# Altium PCB CSI2-IXORA_Rev01.PcbDoc
Units mm, origin at the board's own origin, x right, y up, seen from the top; angles counter-clockwise.
Board outline 24 x 36 mm, 4 copper layers (Layer1 Top, Layer2, Layer3, Layer4 Bottom), stack 1.62 mm thick; 34 components, 30 nets, 118 pads, 71 vias.
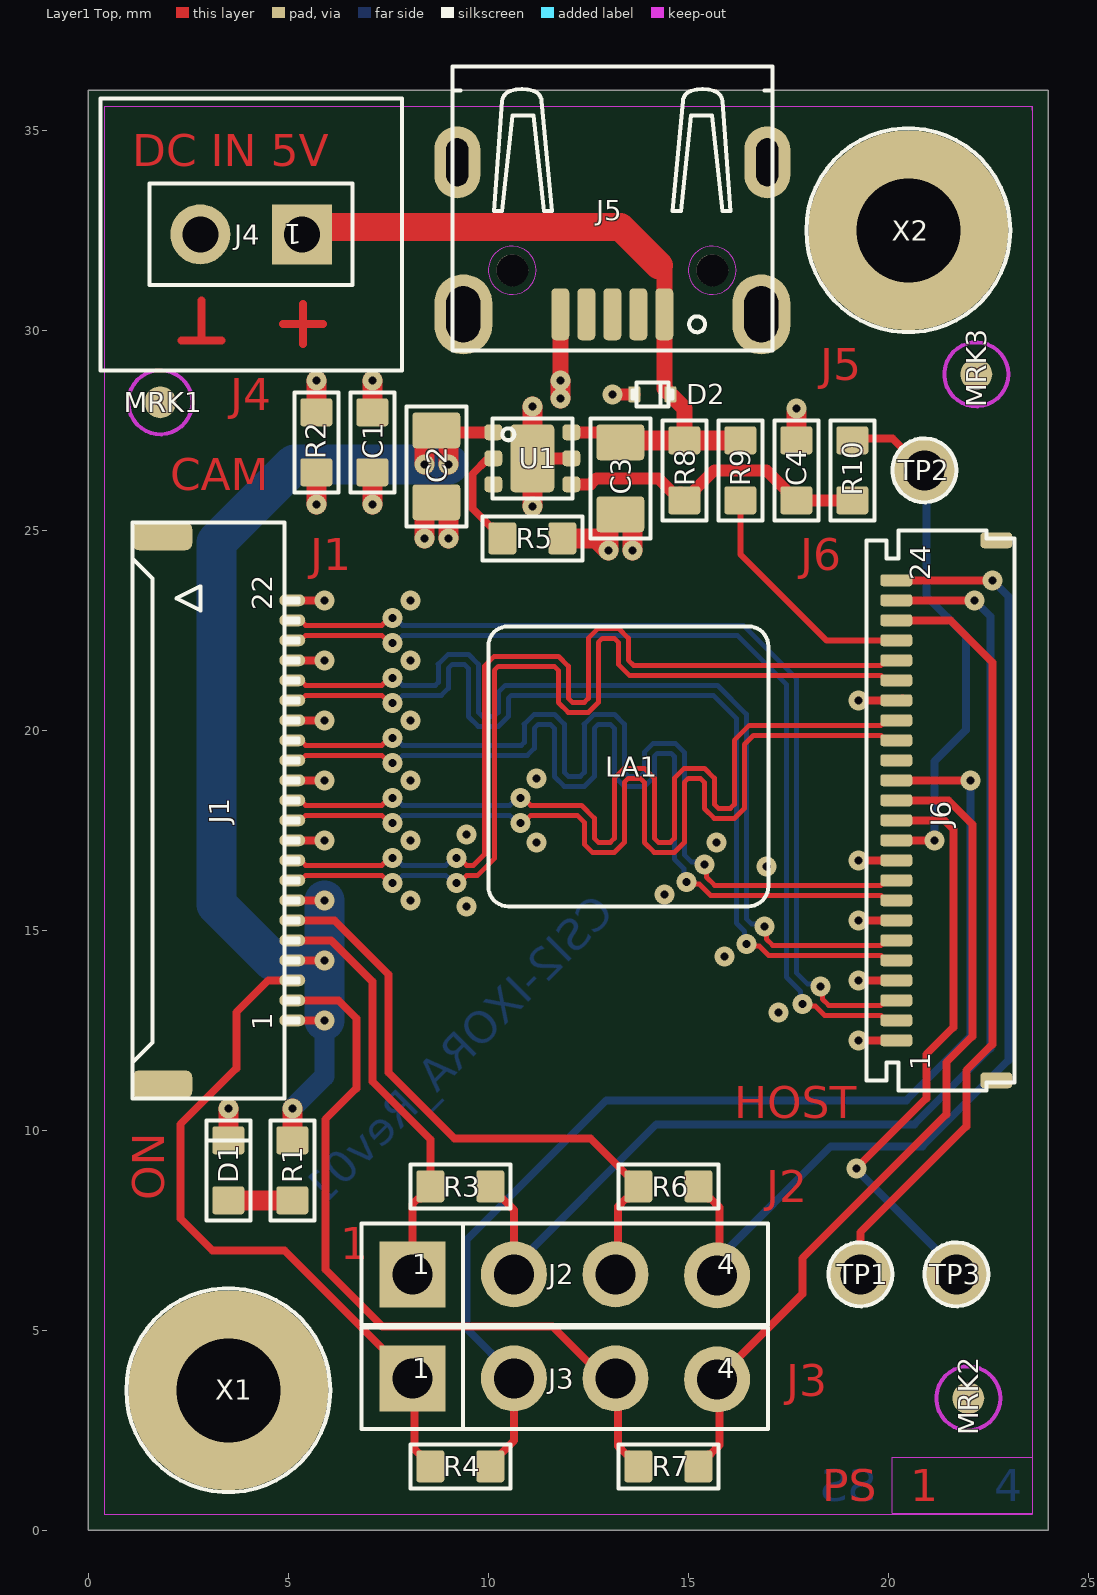
[diagram p0: Layer1 Top view]
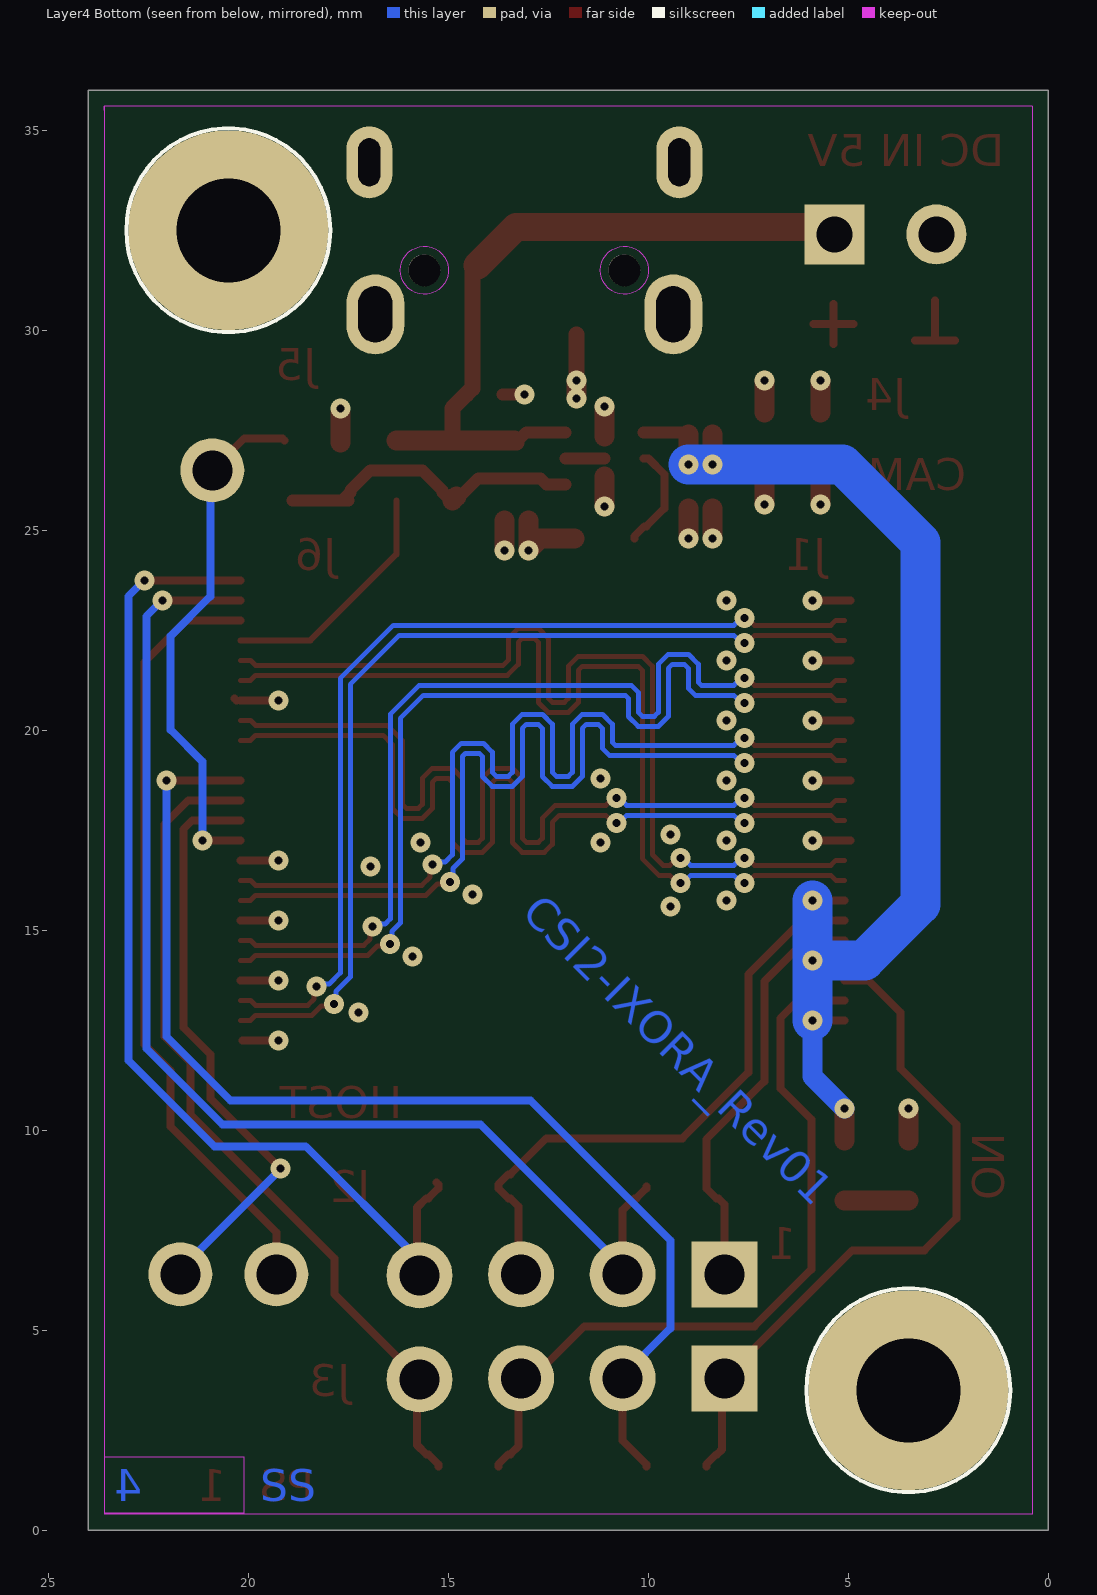
[diagram p1: Layer4 Bottom view, seen from below]
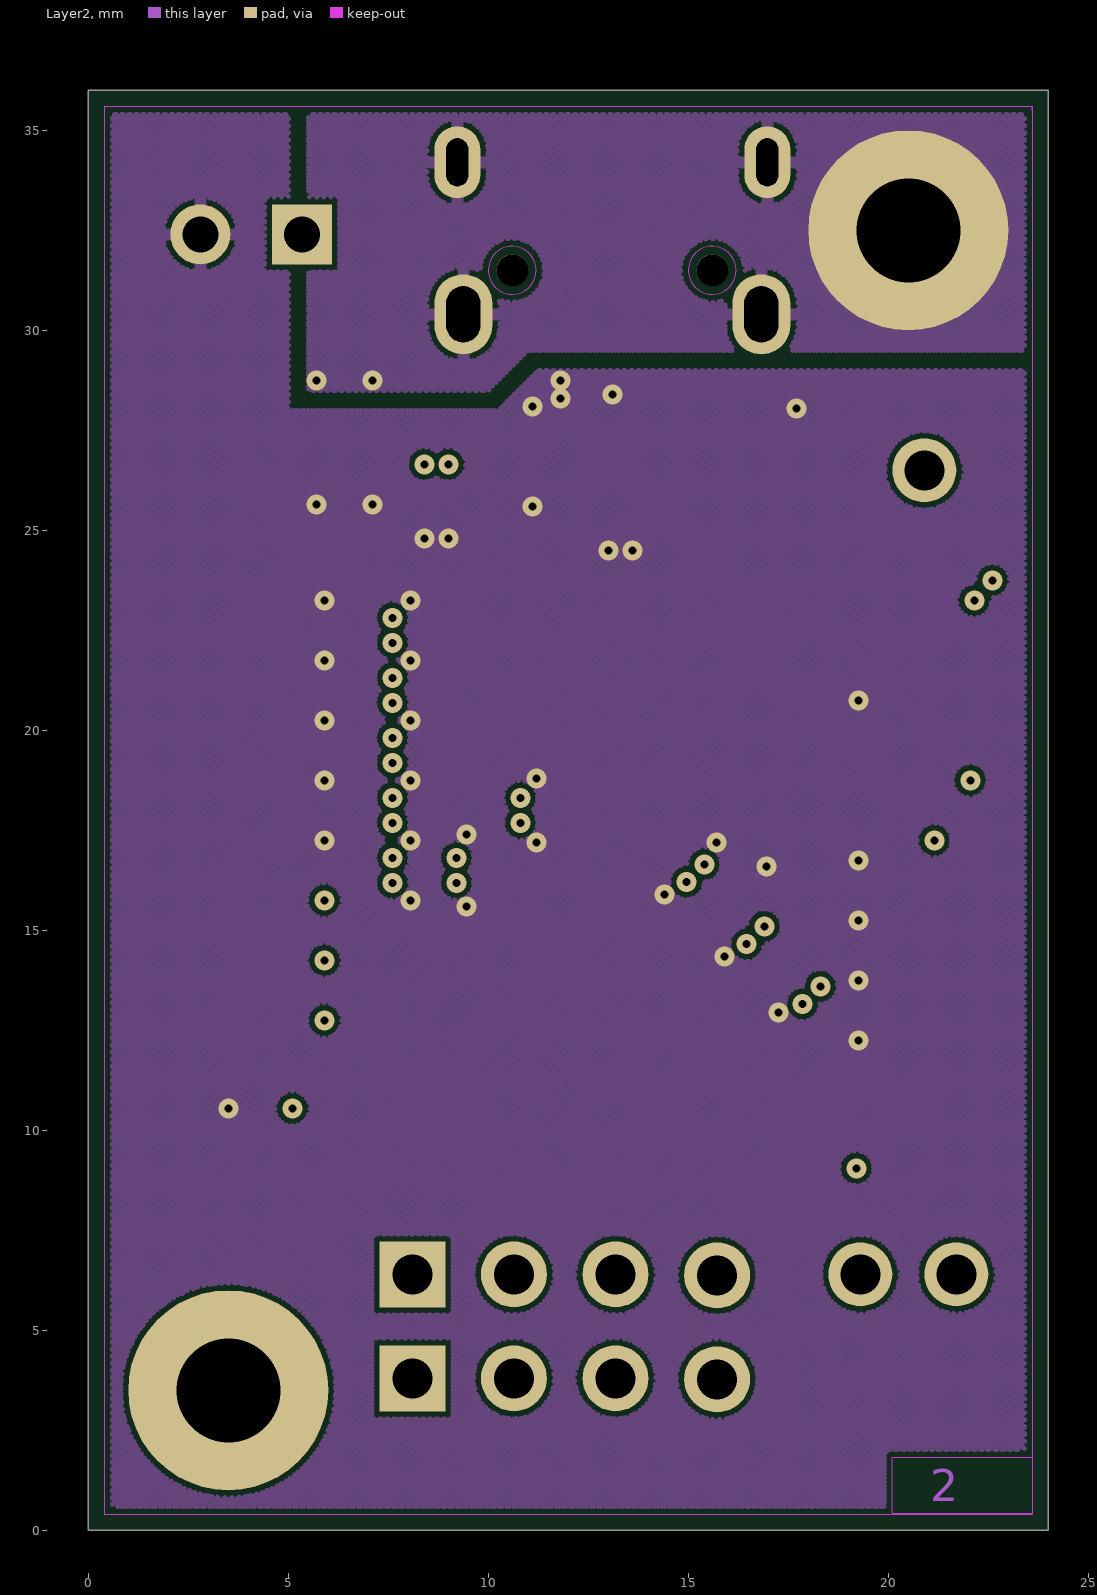
[diagram p2: Layer2]
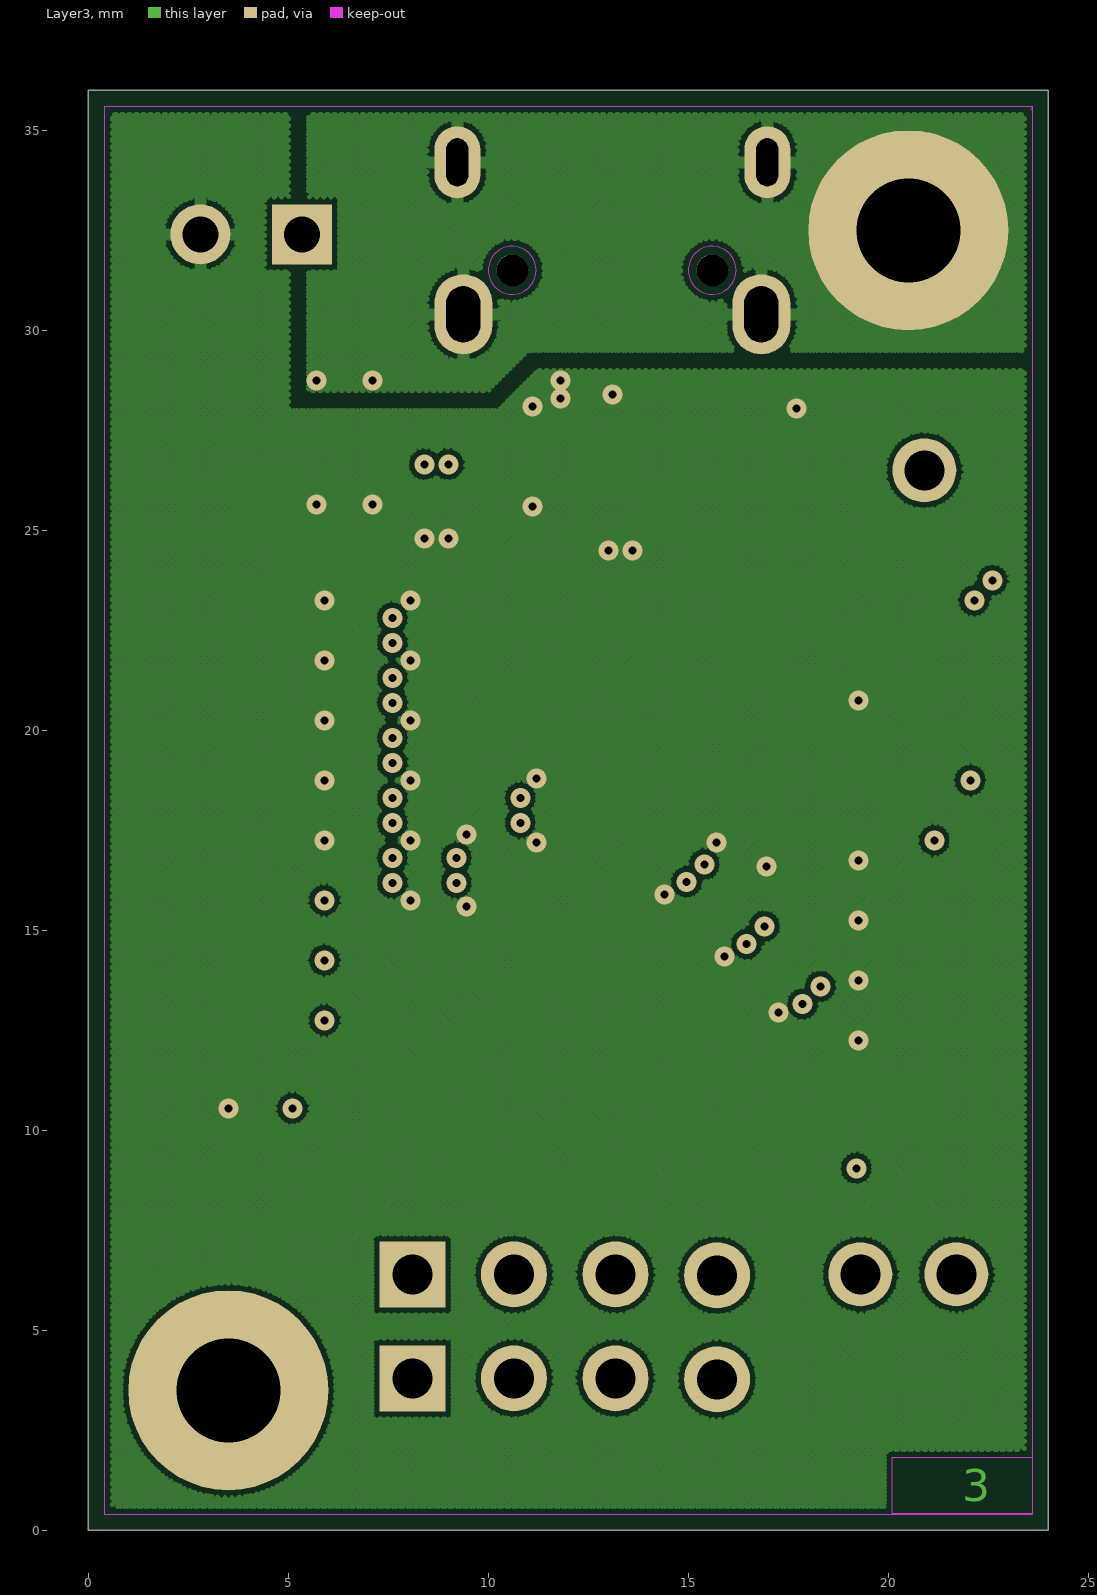
[diagram p3: Layer3]
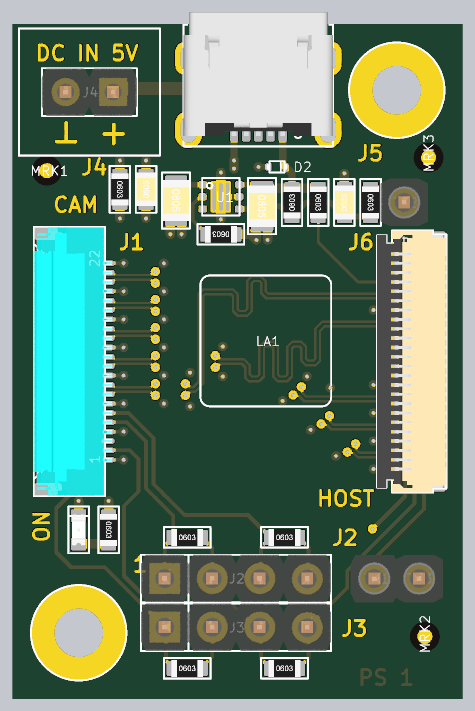
[diagram p4: 3D render of the assembled board from above, using the file's embedded part models]

## Layer stack, top to bottom
Top Solder: solder mask 0.025, Solder Resist, Dk 3.5
Layer1 Top: signal copper 0.035
Dielectric1: prepreg 0.14, PP-006, Dk 4.1
Layer2: signal copper 0.035
Dielectric2: core 1.2, Core-039, Dk 4.8
Layer3: signal copper 0.035
Dielectric3: prepreg 0.14, PP-006, Dk 4.1
Layer4 Bottom: signal copper 0.035
Bottom Solder: solder mask 0.025, Solder Resist, Dk 3.5

## Board outline
0,0 24,0 24,36 0,36

## Design rules (kind name [scope] priority, off if disabled: settings)
Clearance [All] p1: gap=0.125 ignorepadtopadclearanceinfootprint=FALSE except(0: Arc-Hole Track-Hole SMDPad-Hole THPad-Hole Via-Hole Fill-Hole Poly-Hole Region-Hole Text-Hole)
ComponentClearance [All] p1 off: gap=0.254 collisioncheckmode=3 verticalgap=0.254 showdistances=FALSE
DiffPairsRouting [All] p1: maxlimit=1 minlimit=0.125 mostfreqgap=0.125 toplayer_minwidth=0.125 toplayer_maxwidth=0.125 toplayer_prefwidth=0.125 midlayer1_minwidth=0.125 midlayer1_maxwidth=0.125 midlayer1_prefwidth=0.125 midlayer2_minwidth=0.125 midlayer2_maxwidth=0.125 midlayer2_prefwidth=0.125 bottomlayer_minwidth=0.125 bottomlayer_maxwidth=0.125 bottomlayer_prefwidth=0.125 maxuncoupledlength=12.7
FabricationTestPointUsage TestPointUsage [All] p1: valid=0 allowmultiple=FALSE
FabricationTestpoint Testpoint [All] p1: side=3 testpointundercomponent=TRUE minsize=1.016 maxsize=2.54 preferedsize=1.524 minholesize=0 maxholesize=1.016 preferedholesize=0.813 testpointgrid=0.025 allowsidetop=TRUE allowsidebottom=TRUE usegrid=TRUE gridtolerance=0
Height [All] p1 off: minheight=0 maxheight=25.4 prefheight=12.7
HoleSize [All] p1: absolutevalues=TRUE maxlimit=5 minlimit=0.025 maxpercent=80.000 minpercent=20.000
PlaneClearance [All] p1: clearance=0.3
PlaneConnect FreePads [(InPadClass('Free-Pads'))   or (isvia)] p1: planeconnectstyle=Direct reliefexpansion=0.508 reliefentries=4 reliefconductorwidth=0.254 reliefairgap=0.254
PlaneConnect [All] p2: planeconnectstyle=Relief reliefexpansion=0.2 reliefentries=4 reliefconductorwidth=0.2 reliefairgap=0.2
PolygonConnect VIA [isvia or InComponent('X2')] p1: connectstyle=Direct reliefconductorwidth=0.2 reliefentries=4 polygonreliefangle="90 Angle" airgapwidth=0.254
PolygonConnect PolygonConnect_1 [All] p2: connectstyle=Relief reliefconductorwidth=0.3 reliefentries=4 polygonreliefangle="90 Angle" airgapwidth=0.125
RoutingVias [All] p1: holewidth=0.2 width=0.5 viastyle="Through Hole" minholewidth=0.2 minwidth=0.5 maxholewidth=0.2 maxwidth=0.5
SilkToSolderMaskClearance SilkscreenOverComponentPads [IsPad] p1: minsilkscreentomaskgap=0.254 clearancetoexposedcopper=TRUE
SolderMaskExpansion SolderMaskExpansion_VIA [(IsVia)] p1: expansion=-9
SolderMaskExpansion [All] p2: expansion=0.05
Width [All] p1: maxlimit=2 minlimit=0.1 preferedwidth=0.15
21 further rules are at their usual default settings.

## Classes and differential pairs
net class "100 Ohm": B7-CSI2-TXC_N B7-CSI2-TXC_P B7-CSI2-TXD0_N B7-CSI2-TXD0_P B7-CSI2-TXD1_N B7-CSI2-TXD1_P B7-CSI2-TXD2_N B7-CSI2-TXD2_P B7-CSI2-TXD3_N B7-CSI2-TXD3_P
differential pair B7-CSI2-TXC: +B7-CSI2-TXC_P -B7-CSI2-TXC_N
differential pair B7-CSI2-TXD0: +B7-CSI2-TXD0_P -B7-CSI2-TXD0_N
differential pair B7-CSI2-TXD1: +B7-CSI2-TXD1_P -B7-CSI2-TXD1_N
differential pair B7-CSI2-TXD2: +B7-CSI2-TXD2_P -B7-CSI2-TXD2_N
differential pair B7-CSI2-TXD3: +B7-CSI2-TXD3_P -B7-CSI2-TXD3_N

## Components (designator, comment, footprint, x,y, rotation, side; value= is the part's Value field where it differs from the comment)
C1 "1n" C-0603_1.0 7.1,27.2 r90 top
C2 "10u" C-0805_1.4 8.7,26.6 r270 top
C3 "10u" C-0805_1.4 13.3,26.3 r270 top
C4 "100n" C-0603_1.0 17.7,26.5 r90 top
D1 "GREEN" D-0603-LED 3.5,9 r270 top
D2 "ESD9B5.0ST5G" D-SOD923 14.1,28.4 r0 top
J1 "CON FFC22_Inverted" "J-FH55-22S-0.5SH - Inverted Pins" 5.1,18 r270 top locked
J2 "CON1x4" "CON 1x4 RM2.54" 8.1,6.4 r0 top
J3 "CON1x4" "CON 1x4 RM2.54" 8.1,3.8 r0 top
J4 "CON1x2" "CON 1x2 RM2.54" 5.34,32.4 r180 top
J5 "USB 2.0 Typ B 90°" J-629105150521 13.1,30.4 r180 top
J6 "CON FFC24" J-687124182122 21.3,18 r90 top locked
LA1 "LABEL 7x7mm" "PCB LABEL 7x7" 13.5,19.1 r0 top
MRK1 "Marker Single Layer" PCB_MARKER_PAD_TOP 1.8,28.2 r0 top
MRK2 "Marker Single Layer" PCB_MARKER_PAD_TOP 22,3.3 r90 top
MRK3 "Marker Single Layer" PCB_MARKER_PAD_TOP 22.2,28.9 r0 top
R1 "3k3" R-0603_0.6 5.1,9 r270 top
R2 "1M" R-0603_0.6 5.7,27.2 r270 top
R3 "0R0" R-0603_0.6 9.3,8.6 r0 top
R4 "0R0" R-0603_0.6 9.3,1.6 r0 top
R5 "51k" R-0603_0.6 11.1,24.8 r180 top
R6 "0R0" R-0603_0.6 14.5,8.6 r0 top
R7 "0R0" R-0603_0.6 14.5,1.6 r0 top
R8 "270k" R-0603_0.6 14.9,26.5 r90 top
R9 "NL" R-0603_0.6 16.3,26.5 r270 top
R10 "NL" R-0603_0.6 19.1,26.5 r270 top
T1 "PCB Text TOP" "PCB TEXTFIELD TOP 2" -50,-30 r0 top locked
T2 "PCB Text BOT" "PCB TEXTFIELD BOT 2" -50,-30 r180 bottom locked
TP1 "TP" TP_16_10 19.3,6.4 r0 top
TP2 "TP" TP_16_10 20.9,26.5 r270 top
TP3 "TP" TP_16_10 21.7,6.4 r270 top
U1 "TPS25200DRVT" IC-DFN06_2.0x2.0x0.8 11.1,26.8 r270 top
X1 "Hole" HOLE-2.6-5.0-DK 3.5,3.5 r0 top
X2 "Hole" HOLE-2.6-5.0-DK 20.5,32.5 r0 top

## Footprints (in the part's own frame and the unit in brackets; to place one, negate y for a bottom-side part, rotate by r counter-clockwise, add the part's x,y. Pads: shape width x height; smd on the part's side, far side on the other; paste and mask are expansions set on the pad)
C-0603_1.0 [mm]
  rrect20% 0.7x0.8 smd: 1(-0.75,0) 2(0.75,0)
  silkscreen extent -1.25,-0.55 1.25,0.55, body extent -0.9,-0.5 0.9,0.5, height 0.99
C-0805_1.4 [mm]
  rrect20% 0.9x1.2 smd: 1(-0.9,0) 2(0.9,0)
  silkscreen extent -1.5,-0.75 1.5,0.75, body extent -1.1,-0.7 1.1,0.7, height 1.4
"CON 1x2 RM2.54" [mm]
  rect 1.5x1.5 hole 0.9: 1(0,0)
  round 1.5 hole 0.9: 2(2.54,0)
  silkscreen extent -1.27,-1.27 3.81,1.27, body extent -1.26,-1.27 3.82,1.27, height 8.57
"CON 1x4 RM2.54" [mm] "RM2.54 Connector 1x4"
  rect 1.65x1.65 hole 1: 1(0,0)
  round 1.65 hole 1: 2(2.54,0) 3(5.08,0) 4(7.62,-0.025)
  silkscreen extent -1.27,-1.27 8.89,1.27, body extent -1.28,-1.26 8.88,1.28, height 8.57
D-0603-LED [mm] "Osram Chip LED 0603"
  rrect20% 0.7x0.8 smd: A(0.75,0) K(-0.75,0)
  silkscreen extent -1.25,-0.55 1.25,0.55, body extent -0.82,-0.36 0.83,0.36, height 0.67
D-SOD923 [mm]
  rrect20% 0.3x0.4 smd: A(-0.45,0) K(0.45,0)
  silkscreen extent -0.5,-0.3 0.5,0.3, body extent -0.4,-0.3 0.4,0.3, height 0.4
HOLE-2.6-5.0-DK [mm]
  round 5 hole 2.6: 1(0,0)
  silkscreen extent -2.55,-2.55 2.55,2.55
IC-DFN06_2.0x2.0x0.8 [mm]
  rrect50% 0.4x0.45 smd paste-0.02: 1(-0.65,-0.975) 2(0,-0.975) 3(0.65,-0.975) 4(0.65,0.975) 5(0,0.975) 6(-0.65,0.975)
  rrect20% 1.7x1.1 smd paste-9: 7(0,0)
  silkscreen extent -1,-1 1,1, body extent -1,-1 1,1, height 0.85
J-629105150521 [mm]
  rrect50% 0.45x1.3 smd: 1(-1.3,0) 2(-0.65,0) 3(0,0) 4(0.65,0) 5(1.3,0)
  oval 1.15x1.8 hole 0.55 slot 1.2 at 90 deg: 6(-3.875,-3.8) 9(3.875,-3.8)
  oval 1.45x2 hole 0.85 slot 1.4 at 90 deg: 7(-3.725,0) 8(3.725,0)
  round 0.8 hole 0.8 unplated: ""(-2.5,-1.1) ""(2.5,-1.1)
  Keep-Out Layer circle w0.025: c-2.5,-1.1 r0.6
  Keep-Out Layer circle w0.025: c2.5,-1.1 r0.6
  silkscreen extent -4,-6.2 4,0.9, body extent -4,-6.25 4,0.35, height 2.67
J-687124182122 [mm]
  rrect50% 0.3x0.8 smd: 1(-5.75,1.1) 2(-5.25,1.1) 3(-4.75,1.1) 4(-4.25,1.1) 5(-3.75,1.1) 6(-3.25,1.1) 7(-2.75,1.1) 8(-2.25,1.1) 9(-1.75,1.1) 10(-1.25,1.1) 11(-0.75,1.1) 12(-0.25,1.1) 13(0.25,1.1) 14(0.75,1.1) 15(1.25,1.1) 16(1.75,1.1) 17(2.25,1.1) 18(2.75,1.1) 19(3.25,1.1) 20(3.75,1.1) 21(4.25,1.1) 22(4.75,1.1) 23(5.25,1.1) 24(5.75,1.1)
  rrect50% 0.4x0.8 smd: 25(-6.75,-1.4) 26(6.75,-1.4)
  silkscreen extent -7,-1.85 7,1.85, body extent -7,-1.85 7,1.85, height 0.98
"J-FH55-22S-0.5SH - Inverted Pins" [mm]
  oval 0.3x0.65 smd: 1(5.25,0) 2(4.75,0) 3(4.25,0) 4(3.75,0) 5(3.25,0) 6(2.75,0) 7(2.25,0) 8(1.75,0) 9(1.25,0) 10(0.75,0) 11(0.25,0) 12(-0.25,0) 13(-0.75,0) 14(-1.25,0) 15(-1.75,0) 16(-2.25,0) 17(-2.75,0) 18(-3.25,0) 19(-3.75,0) 20(-4.25,0) 21(-4.75,0) 22(-5.25,0)
  rrect50% 0.7x1.5 smd: 23(-6.85,-3.25) 24(6.85,-3.25)
  silkscreen extent -7.2,-4 7.2,0.15, body extent -7.2,-4.05 7.2,0.2, height 1.46
"PCB LABEL 7x7" [mm]
  silkscreen extent -3.5,-3.5 3.5,3.5, body extent -3.5,-3.5 3.5,3.5, height 0.1
"PCB TEXTFIELD BOT 2" [mm]
"PCB TEXTFIELD TOP 2" [mm]
PCB_MARKER_PAD_TOP [mm] "PCB Marker with Pad for X-/Y-Coordinates (Single Layer)"
  round 0.8 smd paste-999 mask+0.4: 1(0,0)
  Layer1 Top keep-out circle w0.1: c0,0 r0.8
R-0603_0.6 [mm]
  rrect20% 0.7x0.8 smd: 1(-0.75,0) 2(0.75,0)
  silkscreen extent -1.25,-0.55 1.25,0.55, body extent -0.85,-0.45 0.85,0.45, height 0.59
TP_16_10 [mm] "Testpoint: Pad=1,6mm; Hole=1,0mm"
  round 1.6 hole 1: 1(0,0)
  silkscreen extent -0.8,-0.8 0.8,0.8, body extent -1.27,-1.27 1.27,1.27, height 8.57

## Part data
C1: library part "C 1N 50V X7R 0603", "Capacitor Ceramic SMD/0603/50V/X7R/10%", Dielectric=X7R, KHK Part Number=K8340038, Manufacturer=several, Tolerance=10%, Voltage=50V, Manufacturer Part Number=several
C2 C3: library part "C 10U 16V X5R 0805", "Capacitor Ceramic SMD/0805/16V/X5R/10%", Dielectric=X5R, KHK Part Number=K8340151, Manufacturer=several, Tolerance=10%, Voltage=16V, Manufacturer Part Number=several
C4: library part "C 100N 50V X7R 0603", "Capacitor Ceramic SMD/0603/50V/X7R/10%", Dielectric=X7R, KHK Part Number=K8340023, Manufacturer=several, Tolerance=10%, Voltage=50V, Manufacturer Part Number=several
D1: library part "D LED 0603 green", "Chip LED green 430mcd", Color=green, Current=20mA, KHK Part Number=8172, Manufacturer=Würth, Manufacturer Part Number=150060GS75000
D2: library part "D ESD9B5.0ST5G", "DIODE TVS; 400W; 5.8-7.8V; BIDIRECT", KHK Part Number=7250, Manufacturer="ON Semiconductor", Manufacturer Part Number=ESD9B5.0ST5G
J1: library part "CON FFC22_FH55-22S-0.5SH_Inverted", "FFC Connector 0.5mm shielded", KHK Part Number=10357, Manufacturer=Hirose, Manufacturer Part Number=FH55-22S-0.5SH
J2 J3: library part "CON 1x4 2.54", "Stiftleiste; 1x4; 2.54mm; gerade", KHK Part Number=K7600564, Manufacturer=Harwin, Manufacturer Part Number="M20-999 0445"
J4: library part "CON 1x2 2.54", "Stiftleiste; 1x2; 2.54mm; gerade", KHK Part Number=K7600582, Manufacturer="fischer elektronik", Manufacturer Part Number="SL 11 124 2 G"
J5: library part "CON USB 2.0 Typ B 90°", "Micro USB 2.0 Typ B 90°", KHK Part Number=14360, Manufacturer=WE, Manufacturer Part Number="629 105 150 521"
J6: library part "CON FFC24_WE_687124182122", "FFC Connector 0.5mm", KHK Part Number=14361, Manufacturer=Würth, Manufacturer Part Number=687124182122
LA1: library part "PCB LABEL 7x7", Manufacturer=several, Manufacturer Part Number=several
MRK1 MRK2 MRK3: library part "PCB Marker Pad Single Layer", "Position Marker for PCBs"
R1: library part "R 3K3 1% 0603", "Standard Resistor SMD/0603/1%/100mW/TK100", KHK Part Number=K8250070, Manufacturer=several, Tolerance=1%, Manufacturer Part Number=several
R2: library part "R 1MEG 1% 0603", "Standard Resistor SMD/0603/1%/100mW/TK100", KHK Part Number=K8250058, Manufacturer=several, Tolerance=1%, Manufacturer Part Number=several
R3 R6: library part "R 0R0 1% 0603", "Standard Resistor SMD/0603/1%/100mW/TK200", KHK Part Number=K8250041, Manufacturer=several, Tolerance=1%, Manufacturer Part Number=several
R4 R7: library part "R 0R0 1% 0603", "Standard Resistor SMD/0603/1%/100mW/TK100", KHK Part Number=K8250041, Manufacturer=several, Tolerance=1%, Manufacturer Part Number=several
R5: library part "R 51K 1% 0603", "Standard Resistor SMD/0603/1%/100mW/TK100", KHK Part Number=K8250156, Manufacturer=several, Tolerance=1%, Manufacturer Part Number=several
R8: library part "R 270K 1% 0603", "Standard Resistor SMD/0603/1%/100mW/TK100", KHK Part Number=K8250170, Manufacturer=several, Temperature Coefficient=na, Tolerance=1%, Manufacturer Part Number=several
R9 R10: library part "R X 0603", "Standard Resistor SMD/0603/1%/100mW/TK200", Temperature Coefficient=TK100, Tolerance=1%
T1: library part "PCB TEXT FIELD TOP", "PCB Textfield TOP"
T2: library part "PCB TEXT FIELD BOT", "PCB Textfield BOT"
TP1 TP2 TP3: library part TP_16_10, "Testpoint: Pad=1,6mm; Hole=1,0mm"
U1: library part "IC  TPS25200DRVT", "IC/PWR/LOADSW;2V5-6V5;2A5;0R099/6-WDFN/2x2x0.8mm", KHK Part Number=14277, Manufacturer="Texas Instruments", I max=2.5A, Manufacturer Part Number=TPS25200DRVT, Vin=2.5V-6.5V
X1 X2: library part "PCB HOLE M2.5-5-DK", "HOLE M2.5"

## Via types
v1: diameter 0.5, hole 0.2, Layer1 Top to Layer4 Bottom, 71 vias

## Nets (pads, with @x,y where several pads share a name; then routed paths per layer and width w, separated by ;. In a path a pad name is that pad's centre, name@x,y a point inside that pad or via, vN(x,y) a via of type N, cw(c..) or ccw(c..) an arc to the next point about the centre after c; other vN are vias at no path point)
3.3V_SW: J6.15
5V_SW: J6.21 R9.2 | length 6.1
  Layer1 Top w0.15: R9.2 16.3,24.4 18.45,22.25 J6.21
B7-CSI2-TXC_N: J1.14 J6.8 | length 23.8
  Layer1 Top w0.125: J1.14 5.311,19.25 5.436,19.375 7.339,19.375 7.527,19.188 v1(7.6,19.188) ; v1(14.958,16.208) 15.01,16.156 15.275,16.156 15.556,15.875 19.818,15.875 19.943,15.75 J6.8
  Layer4 Bottom w0.125: v1(7.6,19.188) 7.673,19.188 7.861,19.375 10.975,19.375 11.15,19.55 11.15,20.05 11.25,20.15 11.55,20.15 11.65,20.05 11.65,18.846 11.896,18.6 ; 11.9,18.6 12.404,18.6 12.65,18.846 12.65,20.05 12.75,20.15 13.05,20.15 13.15,20.05 13.15,18.846 13.396,18.6 13.9,18.6 ; 13.904,18.6 14.15,18.846 14.15,19.35 14.225,19.425 14.571,19.425 14.65,19.346 14.65,16.781 14.888,16.543 14.888,16.278 v1(14.958,16.208)
B7-CSI2-TXC_P: J1.15 J6.9 | length 23.7
  Layer1 Top w0.125: J1.15 5.311,19.75 5.436,19.625 7.339,19.625 7.527,19.813 v1(7.6,19.813) ; v1(15.4,16.65) 15.452,16.598 15.452,16.333 15.66,16.125 19.818,16.125 19.943,16.25 J6.9
  Layer4 Bottom w0.125: v1(7.6,19.813) 7.673,19.813 7.861,19.625 10.825,19.625 10.9,19.7 10.9,20.15 ; 10.898,20.152 11.146,20.4 11.654,20.4 11.9,20.154 11.9,18.95 12,18.85 12.3,18.85 12.4,18.95 12.4,20.15 12.398,20.152 12.646,20.4 13.15,20.4 ; 13.154,20.4 13.4,20.154 13.4,18.95 13.5,18.85 13.8,18.85 13.9,18.95 13.9,19.45 13.9,19.454 14.121,19.675 14.675,19.675 14.9,19.45 14.9,16.885 15.083,16.702 15.348,16.702 v1(15.4,16.65)
B7-CSI2-TXD0_N: J1.20 J6.2 | length 23.7
  Layer1 Top w0.125: J1.20 5.311,22.25 5.436,22.375 7.339,22.375 7.527,22.187 v1(7.6,22.187) ; v1(17.858,13.158) 17.91,13.106 18.175,13.106 18.406,12.875 19.818,12.875 19.943,12.75 J6.2
  Layer4 Bottom w0.125: v1(7.6,22.187) 7.673,22.187 7.861,22.375 16.225,22.375 17.45,21.15 17.45,13.831 17.806,13.475 17.806,13.21 v1(17.858,13.158)
B7-CSI2-TXD0_P: J1.21 J6.3 | length 23.8
  Layer1 Top w0.125: J1.21 5.311,22.75 5.436,22.625 7.339,22.625 7.527,22.812 v1(7.6,22.812) ; v1(18.3,13.6) 18.352,13.548 18.352,13.283 18.51,13.125 19.818,13.125 19.943,13.25 J6.3
  Layer4 Bottom w0.125: v1(7.6,22.812) 7.673,22.812 7.861,22.625 16.375,22.625 17.7,21.3 17.7,13.935 17.983,13.652 18.248,13.652 v1(18.3,13.6)
B7-CSI2-TXD1_N: J1.17 J6.5 | length 23.7
  Layer1 Top w0.125: J1.17 5.311,20.75 5.436,20.875 7.339,20.875 7.527,20.687 v1(7.6,20.687) ; v1(16.458,14.658) 16.51,14.606 16.775,14.606 17.006,14.375 19.818,14.375 19.943,14.25 J6.5
  Layer4 Bottom w0.125: v1(7.6,20.687) 7.673,20.687 7.861,20.875 8.825,20.875 9,21.05 9,21.55 9.1,21.65 9.4,21.65 9.5,21.55 9.5,20.346 9.746,20.1 ; 9.75,20.1 10.254,20.1 10.5,20.346 10.5,20.8 10.575,20.875 15.625,20.875 16.2,20.3 16.2,15.181 16.406,14.975 16.406,14.71 v1(16.458,14.658)
B7-CSI2-TXD1_P: J1.18 J6.6 | length 23.8
  Layer1 Top w0.125: J1.18 5.311,21.25 5.436,21.125 7.339,21.125 7.527,21.312 v1(7.6,21.312) ; v1(16.9,15.1) 16.952,15.048 16.952,14.783 17.11,14.625 19.818,14.625 19.943,14.75 J6.6
  Layer4 Bottom w0.125: v1(7.6,21.312) 7.673,21.312 7.861,21.125 8.675,21.125 8.75,21.2 8.75,21.65 ; 8.748,21.652 8.996,21.9 9.504,21.9 9.75,21.654 9.75,20.45 9.85,20.35 10.15,20.35 10.25,20.45 10.25,20.95 10.425,21.125 15.729,21.125 16.45,20.404 16.45,15.285 16.583,15.152 16.848,15.152 v1(16.9,15.1)
B7-CSI2-TXD2_N: J1.11 J6.16 | length 23.8
  Layer1 Top w0.125: J1.11 5.311,17.75 5.436,17.875 7.339,17.875 7.527,17.687 v1(7.6,17.687) ; v1(10.8,17.687) 10.873,17.687 11.061,17.875 12.225,17.875 12.4,17.7 12.4,17.15 12.6,16.95 13.154,16.95 13.4,17.196 13.4,18.7 13.5,18.8 13.8,18.8 13.9,18.7 13.9,17.196 14.146,16.95 14.654,16.95 14.9,17.196 14.9,18.7 15,18.8 15.3,18.8 15.4,18.7 15.4,18.05 15.4,18.046 15.646,17.8 16.154,17.8 16.4,18.046 ; 16.4,18.05 16.4,19.646 16.629,19.875 19.818,19.875 19.943,19.75 J6.16
  Layer4 Bottom w0.125: v1(7.6,17.687) 7.673,17.687 7.861,17.875 10.539,17.875 10.727,17.687 v1(10.8,17.687)
B7-CSI2-TXD2_P: J1.12 J6.17 | length 23.7
  Layer1 Top w0.125: J1.12 5.311,18.25 5.436,18.125 7.339,18.125 7.527,18.312 v1(7.6,18.312) ; v1(10.8,18.312) 10.873,18.312 11.061,18.125 12.329,18.125 12.65,17.804 12.65,17.3 12.75,17.2 13.05,17.2 13.15,17.3 13.15,18.804 13.396,19.05 13.904,19.05 14.15,18.804 14.15,17.3 14.25,17.2 14.55,17.2 14.65,17.3 14.65,18.804 14.896,19.05 15.404,19.05 15.65,18.804 15.65,18.8 15.65,18.15 15.75,18.05 16.05,18.05 16.15,18.15 16.15,19.75 16.525,20.125 19.818,20.125 19.943,20.25 J6.17
  Layer4 Bottom w0.125: v1(7.6,18.312) 7.673,18.312 7.861,18.125 10.539,18.125 10.727,18.312 v1(10.8,18.312)
B7-CSI2-TXD3_N: J1.8 J6.19 | length 23.7
  Layer1 Top w0.125: J1.8 5.311,16.25 5.436,16.375 7.339,16.375 7.527,16.187 v1(7.6,16.187) ; v1(9.2,16.187) 9.273,16.187 9.461,16.375 9.735,16.375 10.15,16.79 10.15,21.5 10.25,21.6 11.65,21.6 11.75,21.5 11.75,20.696 11.996,20.45 12.504,20.45 12.75,20.696 12.75,22.2 12.85,22.3 13.15,22.3 13.25,22.2 13.25,21.65 13.525,21.375 19.818,21.375 19.943,21.25 J6.19
  Layer4 Bottom w0.125: v1(7.6,16.187) 7.673,16.187 7.861,16.375 8.939,16.375 9.127,16.187 v1(9.2,16.187)
B7-CSI2-TXD3_P: J1.9 J6.20 | length 23.7
  Layer1 Top w0.125: J1.9 5.311,16.75 5.436,16.625 7.339,16.625 7.527,16.812 v1(7.6,16.812) ; v1(9.2,16.812) 9.273,16.812 9.461,16.625 9.631,16.625 9.9,16.894 9.9,21.604 10.146,21.85 11.754,21.85 12,21.604 12,20.8 12.1,20.7 12.4,20.7 12.5,20.8 12.5,22.304 12.746,22.55 13.254,22.55 13.5,22.304 13.5,21.754 13.629,21.625 19.818,21.625 19.943,21.75 J6.20
  Layer4 Bottom w0.125: v1(7.6,16.812) 7.673,16.812 7.861,16.625 8.939,16.625 9.127,16.812 v1(9.2,16.812)
C-GND: C1.2 J5.6 J5.7 J5.8 J5.9 R2.1 X2.1 | length 1.6
  Layer1 Top w0.5: R2.1 v1(5.7,28.75) ; C1.2 v1(7.1,28.75)
CAM1_MCLK: J6.12 TP3.1 | length 14.8
  Layer1 Top w0.2: v1(19.2,9.05) 20.95,10.8 20.95,11.9 21.625,12.575 21.625,17.525 21.4,17.75 J6.12
  Layer4 Bottom w0.2: v1(19.2,9.05) 19.2,9.019 21.7,6.519 TP3.1 TP3.1@21.6,6.4
CSI_GPIO0_RST: J6.11 R10.1 TP2.1 | length 13.1
  Layer1 Top w0.2: R10.1 19.15,27.3 20.1,27.3 TP2.1 ; J6.11 v1(21.15,17.25)
  Layer4 Bottom w0.15: TP2.1@20.9,26.3 TP2.1
  Layer4 Bottom w0.2: TP2.1@20.9,26.3 20.95,26.25 20.95,23.35 21.94,22.36 21.94,20.012 21.15,19.222 v1(21.15,17.25)
CSI_GPIO1: J6.22 TP1.1 | length 19.5
  Layer1 Top w0.2: TP1.1 19.3,7.45 21.95,10.1 21.95,11.5 22.6,12.15 22.6,21.7 21.55,22.75 J6.22
CSI_GPIO2: J2.2 J6.23 R3.2 | length 30.6
  Layer1 Top w0.15: J2.2 J2.2@10.927,6.113
  Layer1 Top w0.2: R3.2 10.05,8.55 10.3,8.3 10.35,8.3 10.64,8.01 J2.2 ; J6.23 v1(22.15,23.25)
  Layer4 Bottom w0.2: J2.2 10.64,6.59 14.2,10.15 20.65,10.15 22.55,12.05 22.55,22.85 v1(22.15,23.25)
CSI_GPIO3: J2.4 J6.24 R6.2 | length 26.9
  Layer1 Top w0.2: R6.2@15.3,8.7 15.25,8.65 R6.2 15.25,8.55 15.5,8.3 15.55,8.3 15.78,8.07 J2.4@15.78,6.375 ; J6.24 v1(22.6,23.75)
  Layer4 Bottom w0.15: J2.4 J2.4@15.72,6.756
  Layer4 Bottom w0.2: J2.4@15.72,6.756 18.564,9.6 20.85,9.6 23,11.75 23,23.35 v1(22.6,23.75)
EXT-GPIO0-I2C-SCL: J1.2 J3.3 R7.1 | length 19.2
  Layer1 Top w0.2: J1.2 6.25,13.25 6.7,12.8 6.7,11.05 5.925,10.275 5.925,6.525 7.35,5.1 11.6,5.1 12.9,3.8 J3.3 ; J3.3@13.24,3.8 13.24,2.11 13.45,1.9 13.5,1.9 13.75,1.65 R7.1
EXT-GPIO1-I2C-SDA: J1.3 J3.1 R4.1 | length 17.3
  Layer1 Top w0.2: J1.3 4.5,13.75 3.7,12.95 3.7,11.55 2.3,10.15 2.3,7.8 3.1,7 4.9,7 J3.1 ; J3.1@8.16,3.8 8.16,2.017 8.277,1.9 8.3,1.9 8.55,1.65 R4.1
EXT-GPIO2: J1.5 J2.1 R3.1 | length 10.6
  Layer1 Top w0.2: J1.5 6.072,14.75 7.1,13.722 7.1,11.225 8.55,9.775 R3.1 8.55,8.55 8.3,8.3 8.25,8.3 8.1,8.15 J2.1
EXT-GPIO3: J1.6 J2.3 R6.1 | length 15.2
  Layer1 Top w0.2: J1.6 J1.6@5.305,15.25 ; J1.6@5.405,15.25 6.15,15.25 7.5,13.9 7.5,11.45 9.15,9.8 12.55,9.8 13.45,8.9 13.5,8.9 13.75,8.65 R6.1 13.75,8.55 13.5,8.3 13.45,8.3 13.24,8.09 J2.3@13.24,6.4
GND: C1.1 C2.2 C3.2 C4.2 D1.K D2.A J1.10 J1.13 J1.16 J1.19 J1.22 J4.2 J5.5 J6.1 J6.4 J6.7 J6.10 J6.18 R2.2 R5.1 U1.5 U1.7 | length 21.5
  Layer1 Top w0.2: J1.10@4.95,17.25 v1(5.9,17.25) ; J1.13@4.95,18.75 v1(5.9,18.75) ; J1.16@4.95,20.25 v1(5.9,20.25) ; J1.19@4.95,21.75 v1(5.9,21.75) ; J1.22@4.95,23.25 v1(5.9,23.25) ; v1(19.25,12.25) J6.1@20.15,12.25 ; v1(19.25,13.75) J6.4 ; v1(19.25,15.25) J6.7 ; v1(19.25,16.75) J6.10 ; v1(19.25,20.75) J6.18 ; J6.18@20.3,20.75 J6.18@20.35,20.8
  Layer1 Top w0.3: U1.7 U1.5 ; v1(13.1,28.4) D2.A
  Layer1 Top w0.4: v1(11.8,28.75) J5.5@11.8,29.9
  Layer1 Top w0.5: D1.K v1(3.5,10.55) ; v1(5.7,25.65) R2.2@5.7,26.4 ; v1(7.1,25.65) C1.1@7.1,26.4 ; v1(8.4,24.8) C2.2@8.4,25.55 ; v1(9,24.8) C2.2@9,25.55 ; v1(11.1,25.6) U1.7@11.1,26.35 ; U1.7@11.1,27.35 v1(11.1,28.1) ; v1(11.8,28.3) v1(11.8,28.75) ; R5.1 12.7,24.8 v1(13,24.5) C3.2@13,25.25 ; v1(13.6,24.5) C3.2@13.6,25.25 ; C4.2@17.7,27.2 C4.2 v1@17.7,27.95
  other v1: 17.25,12.95 15.9,14.35 9.45,15.6 8.05,15.75 14.4,15.9 16.95,16.6 11.2,17.2 15.7,17.2 8.05,17.25 9.45,17.4 8.05,18.75 11.2,18.8 8.05,20.25 8.05,21.75 8.05,23.25 17.7,28.05
I2C_CAM1_SCL: J3.4 J6.13 R7.2 | length 21.1
  Layer1 Top w0.2: R7.2 15.25,1.65 15.5,1.9 15.55,1.9 15.78,2.13 J3.4@15.78,3.775 ; J3.4 17.85,5.905 17.85,6.8 21.45,10.4 21.45,11.7 22.1,12.35 22.1,17.65 21.5,18.25 J6.13
I2C_CAM1_SDA: J3.2 J6.14 R4.2 | length 29.3
  Layer1 Top w0.2: R4.2 10.05,1.65 10.64,2.24 J3.2 ; J6.14 v1(22.05,18.75)
  Layer4 Bottom w0.15: J3.2 J3.2@10.64,3.86
  Layer4 Bottom w0.2: J3.2@10.64,3.86 9.45,5.05 9.45,7.25 12.95,10.75 20.45,10.75 22.05,12.35 v1(22.05,18.75)
NetC4_1: C4.1 R8.1 R10.2 U1.4 | length 7.8
  Layer1 Top w0.3: U1.4 12.55,26.15 12.7,26.3 14.25,26.3 R8.1@14.7,25.85 ; R8.1 14.95,25.75 15.15,25.95 15.15,26 15.65,26.5 16.95,26.5 17.45,26 17.45,25.95 C4.1@17.65,25.75 ; C4.1@17.5,25.75 C4.1@17.65,25.75 ; R10.2@18.9,25.75 C4.1 C4.1@17.65,25.75
  Layer1 Top w0.5: R8.1@14.8,25.85 R8.1
NetD1_A: D1.A R1.2 | length 1.6
  Layer1 Top w0.5: D1.A R1.2
NetR5_2: R5.2 U1.2 | length 2.6
  Layer1 Top w0.2: U1.2 10.117,26.792 9.992,26.792 9.6,26.4 9.6,25.55 10.05,25.1 10.1,25.1 10.35,24.85 R5.2
VCC-CAM: C2.1 J1.1 J1.4 J1.7 R1.1 U1.1 | length 30.3
  Layer1 Top w0.2: J1.1 v1(5.9,12.75) ; J1.4 v1(5.9,14.25) ; J1.7 v1(5.9,15.75)
  Layer1 Top w0.3: C2.1@9,27.45 U1.1
  Layer1 Top w0.5: R1.1 v1(5.1,10.55) ; v1(8.4,26.65) C2.1@8.4,27.4 ; v1(9,26.65) C2.1@9,27.4
  Layer4 Bottom w0.5: v1(5.1,10.55) 5.9,11.35 v1(5.9,12.75)
  Layer4 Bottom w1: v1(5.9,12.75) v1(5.9,14.25) ; v1(5.9,15.75) v1(5.9,14.25) ; v1(9,26.65) v1(8.4,26.65) 5.15,26.65 3.2,24.7 3.2,15.65 4.6,14.25 v1(5.9,14.25)
VCC-EXT-IN: C3.1 D2.K J4.1 J5.1 R8.2 R9.1 U1.6 | length 18.2
  Layer1 Top w0.3: U1.6 13.05,27.45 C3.1
  Layer1 Top w0.4: C3.1 C3.1@13.35,27.25 ; 14.27,31.62 14.4,31.49 J5.1 14.4,28.55 D2.K 14.9,28.05 R8.2
  Layer1 Top w0.5: C3.1@13.35,27.25 R8.2 R9.1
  Layer1 Top w0.7: J4.1 J4.1@5.528,32.588 ; J4.1@5.678,32.588 13.302,32.588 14.27,31.62
pads on no net: J1.23 J1.24 J5. J5.2 J5.3 J5.4 J6.25 J6.26 MRK1.1 MRK2.1 MRK3.1 U1.3 X1.1
copper on no net: | length 4
  Layer1 Top w0.2: 2.33,29.75 3.33,29.75 ; 2.83,29.75 2.83,30.75 ; 4.87,30.156 5.87,30.156 ; 5.37,29.656 5.37,30.656

## Polygon pours and split planes (outlines as drawn)
C-GND on Layer3 "Layer3-C-GND" (hatched 45Degree grid 0.125 track 0.125, remove dead copper, pour order 24): 5.5,28.5 5.5,35.5 23.5,35.5 23.5,29.5 11,29.5 10,28.5
GND on Layer3 "Layer3-GND" (hatched 45Degree grid 0.125 track 0.125, remove dead copper, pour order 26): 0.5,35.5 5,35.5 5,28 10.25,28 11.25,29 23.5,29 23.5,0.5 0.5,0.5
C-GND on Layer2 "Layer2-C-GND" (hatched 45Degree grid 0.125 track 0.125, remove dead copper, pour order 28): 5.5,28.5 5.5,35.5 23.5,35.5 23.5,29.5 11,29.5 10,28.5
GND on Layer2 "Layer2-GND" (hatched 45Degree grid 0.125 track 0.125, remove dead copper, pour order 30): 0.5,35.5 5,35.5 5,28 10.25,28 11.25,29 23.5,29 23.5,0.5 0.5,0.5

## Keep-outs
Keep-Out Layer:
  lines w0.024: 20.1,1.825 20.1,0.425 23.6,0.425
  lines w0.025: 20.1,1.825 23.6,1.825 ; 23.6,35.5 23.6,35.5 ; 23.6,35.5 23.6,35.6 ; 23.6,35.6 23.6,0.4 0.4,0.4 0.4,35.6 23.6,35.6

## Other copper
Layer1 Top:
  text "DC IN 5V" at 1.1,34.1 h0.8
  text "J5" at 18.3,28.75 h0.8
  text "J4" at 3.55,28 h0.8
  text "CAM" at 2.05,26 h0.8
  text "J1" at 5.55,24 h0.8
  text "J6" at 17.8,24 h0.8
  text "HOST" at 16.15,10.3 h0.8
  text "ON" at 1.9,8.25 h0.8 r90
  text "J2" at 16.95,8.2 h0.8
  text "1" at 6.3,6.775 h0.8
  text "J3" at 17.45,3.35 h0.8
  text "PS" at 18.35,0.725 h0.8
  text "1" at 20.55,0.725 h0.8
Layer2:
  text "2" at 21.05,0.725 h0.8
  text "Layer 2" at -16.75,-37.75 h0.9
Layer3:
  text "3" at 21.85,0.725 h0.8
  text "Layer 3" at -16.75,-37.75 h0.9
Layer4 Bottom:
  text "CSI2-IXORA_Rev01" at 13.2,15.4 h0.8 r45
  text "SS" at 19.7,0.725 h0.8
  text "4" at 22.65,0.725 h0.8

## Silkscreen, mask and mechanical layers (free items; w line width, h text height)
Top Overlay:
  lines w0.1: 0.3,29 7.84,29 7.84,35.8 0.3,35.8 0.3,29
Top Solder:
  lines w0.25: 2.33,29.75 3.33,29.75 ; 2.83,29.75 2.83,30.75 ; 4.87,30.156 5.87,30.156 ; 5.37,29.656 5.37,30.656
  text "DC IN 5V" at 1.1,34.1 h0.8
  text "J5" at 18.3,28.75 h0.8
  text "J4" at 3.55,28 h0.8
  text "CAM" at 2.05,26 h0.8
  text "J1" at 5.55,24 h0.8
  text "J6" at 17.8,24 h0.8
  text "HOST" at 16.15,10.3 h0.8
  text "ON" at 1.9,8.25 h0.8 r90
  text "J2" at 16.95,8.2 h0.8
  text "1" at 6.3,6.775 h0.8
  text "J3" at 17.45,3.35 h0.8
Bottom Solder:
  text "CSI2-IXORA_Rev01" at 13.2,15.4 h0.8 r45
Mechanical 1:
  the board outline again, w0.025
Drill Drawing:
  circle w0.1: c-98.084,-17.397 r0.417
  lines w0.1: -99.24,-22.126 -30.959,-22.126 ; -99.24,-9.001 -30.959,-9.001 ; -97.54,35.96 -59.79,35.96 ; -97.54,37.46 -59.79,37.46 ; -97.54,38.96 -59.79,38.96 ; -97.54,40.46 -59.79,40.46 ; -97.54,41.96 -59.79,41.96 ; -97.54,43.46 -59.79,43.46 ; -97.54,44.96 -59.79,44.96 ; -97.54,46.46 -59.79,46.46 ; -92.434,-24.001 -92.434,-7.126 ; -83.791,-24.001 -83.791,-7.126 ; -82.54,32.46 -82.54,33.96 ; -82.54,34.46 -82.54,47.96 ; -75.54,32.46 -75.54,33.96 ; -75.54,34.46 -75.54,47.96 ; -67.051,-24.001 -67.051,-7.126 ; -60.808,-24.001 -60.808,-7.126 ; -51.715,-24.001 -51.715,-7.126 ; -99.24,-24.001 -30.959,-24.001 -30.959,-7.126 -99.24,-7.126 -99.24,-24.001 ; -98.5,-21.147 -98.084,-21.563 -97.667,-21.147 -98.084,-20.73 -98.5,-21.147 ; -98.5,-19.688 -98.084,-19.48 -97.667,-19.688 -97.875,-19.272 -97.667,-18.855 -98.084,-19.063 -98.5,-18.855 -98.292,-19.272 -98.5,-19.688 ; -98.5,-15.938 -98.5,-15.73 -98.292,-15.522 -98.5,-15.313 -98.5,-15.105 -98.292,-15.105 -98.084,-15.313 -97.875,-15.105 -97.667,-15.105 -97.667,-15.313 -97.875,-15.522 -97.667,-15.73 -97.667,-15.938 -97.875,-15.938 -98.084,-15.73 -98.292,-15.938 -98.5,-15.938 ; -98.5,-13.855 -98.292,-13.855 -98.084,-14.063 -97.875,-13.855 -97.667,-13.855 -97.875,-13.647 -97.667,-13.438 -97.875,-13.438 -98.084,-13.23 -98.292,-13.438 -98.5,-13.438 -98.292,-13.647 -98.5,-13.855 ; -98.5,-11.98 -98.292,-11.98 -98.292,-12.188 -97.875,-12.188 -97.875,-11.98 -97.667,-11.98 -97.667,-11.563 -97.875,-11.563 -97.875,-11.355 -98.292,-11.355 -98.292,-11.563 -98.5,-11.563 -98.5,-11.98 ; -98.5,-10.313 -97.667,-10.313 -97.667,-9.48 -98.5,-9.48 -98.5,-10.313 ; -98.334,-19.522 -98.084,-19.397 -97.834,-19.522 -97.959,-19.272 -97.834,-19.022 -98.084,-19.147 -98.334,-19.022 -98.209,-19.272 -98.334,-19.522 ; -98.334,-13.772 -98.209,-13.772 -98.084,-13.897 -97.959,-13.772 -97.834,-13.772 -97.959,-13.647 -97.834,-13.522 -97.959,-13.522 -98.084,-13.397 -98.209,-13.522 -98.334,-13.522 -98.209,-13.647 -98.334,-13.772 ; -97.54,32.46 -59.79,32.46 -59.79,33.96 -97.54,33.96 -97.54,32.46 ; -97.54,34.46 -97.54,47.96 -59.79,47.96 -59.79,34.46 -97.54,34.46 ; -97.54,48.46 -97.54,49.96 -59.79,49.96 -59.79,48.46 -97.54,48.46
  text "Layer Stackup 4  FR4 TG150" at -96.54,48.96 h0.8
  text "Top Soldermask" at -96.54,46.96 h0.8
  text "25 um" at -80.04,46.96 h0.8
  text "standard" at -74.54,46.96 h0.8
  text "Layer1 Top" at -96.29,45.46 h0.8
  text "35 um" at -80.04,45.46 h0.8
  text "Signal / Zdiff 100R" at -74.54,45.46 h0.8
  text "L 125um / S 125um / L 125um" at -58.29,45.46 h0.8
  text "Prepreg 2x1080" at -96.29,43.96 h0.8
  text "140 um" at -80.79,43.96 h0.8
  text "Layer2" at -96.29,42.46 h0.8
  text "35 um" at -80.04,42.46 h0.8
  text "Plane / Ref." at -74.54,42.46 h0.8
  text "Core / Prepreg" at -96.29,40.96 h0.8
  text "1200 um" at -81.54,40.96 h0.8
  text "Layer3" at -96.29,39.46 h0.8
  text "35 um" at -80.04,39.46 h0.8
  text "Plane / Ref." at -74.54,39.46 h0.8
  text "Prepreg 2x1080" at -96.29,37.96 h0.8
  text "140 um" at -80.79,37.96 h0.8
  text "Layer4 Bottom" at -96.29,36.46 h0.8
  text "35 um" at -80.04,36.46 h0.8
  text "Signal / Zdiff 100R" at -74.54,36.46 h0.8
  text "L 125um / S 125um / L 125um" at -58.29,36.46 h0.8
  text "Bottom Soldermask" at -96.29,34.96 h0.8
  text "25 um" at -80.04,34.96 h0.8
  text "standard" at -74.54,34.96 h0.8
  text "Thickness approx." at -96.54,32.96 h0.8
  text "1600 um" at -81.54,32.96 h0.8
  text "Symbol" at -98.115,-8.438 h0.9
  text "Hit Count" at -91.872,-8.438 h0.9
  text "Finished Hole Size" at -83.229,-8.438 h0.9
  text "Plated" at -66.489,-8.438 h0.9
  text "Hole Type" at -60.245,-8.438 h0.9
  text "Drill Layer Pair" at -51.153,-8.438 h0.9
  text "71" at -91.872,-10.313 h0.75
  text "0,200mm (7,87mil)" at -83.229,-10.313 h0.75
  text "PTH" at -66.489,-10.313 h0.75
  text "Round" at -60.245,-10.313 h0.75
  text "Layer1 Top - Layer4 Bottom" at -51.153,-10.313 h0.75
  text "2" at -91.872,-12.188 h0.75
  text "0,550mm (21,65mil)" at -83.229,-12.188 h0.75
  text "PTH" at -66.489,-12.188 h0.75
  text "Slot" at -60.245,-12.188 h0.75
  text "Layer1 Top - Layer4 Bottom" at -51.153,-12.188 h0.75
  text "2" at -91.872,-14.063 h0.75
  text "0,800mm (31,50mil)" at -83.229,-14.063 h0.75
  text "NPTH" at -66.489,-14.063 h0.75
  text "Round" at -60.245,-14.063 h0.75
  text "Layer1 Top - Layer4 Bottom" at -51.153,-14.063 h0.75
  text "2" at -91.872,-15.938 h0.75
  text "0,850mm (33,47mil)" at -83.229,-15.938 h0.75
  text "PTH" at -66.489,-15.938 h0.75
  text "Slot" at -60.245,-15.938 h0.75
  text "Layer1 Top - Layer4 Bottom" at -51.153,-15.938 h0.75
  text "2" at -91.872,-17.813 h0.75
  text "0,900mm (35,43mil)" at -83.229,-17.813 h0.75
  text "PTH" at -66.489,-17.813 h0.75
  text "Round" at -60.245,-17.813 h0.75
  text "Layer1 Top - Layer4 Bottom" at -51.153,-17.813 h0.75
  text "11" at -91.872,-19.688 h0.75
  text "1,000mm (39,37mil)" at -83.229,-19.688 h0.75
  text "PTH" at -66.489,-19.688 h0.75
  text "Round" at -60.245,-19.688 h0.75
  text "Layer1 Top - Layer4 Bottom" at -51.153,-19.688 h0.75
  text "2" at -91.872,-21.563 h0.75
  text "2,600mm (102,36mil)" at -83.229,-21.563 h0.75
  text "PTH" at -66.489,-21.563 h0.75
  text "Round" at -60.245,-21.563 h0.75
  text "Layer1 Top - Layer4 Bottom" at -51.153,-21.563 h0.75
  text "92 Total" at -91.872,-23.438 h0.75
  text "Slot definitions :" at -98.115,-25.2 h0.75
  text "Routed Path Length" at -85.276,-25.2 h0.75
  text "= Calculated from tool start centre position to tool end centre position." at -71.563,-25.2 h0.75
  text "Hole Length" at -85.276,-26.4 h0.75
  text "= Routed Path Length + Tool Size = Slot length as defined in the PCB layout" at -76.686,-26.4 h0.75

## Dimensions
0,36 to 0,0 on Drill Drawing
24,36 to 0,36 on Drill Drawing

## Text inside footprints (layer, text, board x,y; h text height)
J1: Top Overlay "1" at 4.6,12.5 h0.5 r90; Top Overlay "22" at 4.6,23 h0.5 r90
J2: Top Overlay "1" at 8.1,6.4 h0.5; Top Overlay "4" at 15.72,6.4 h0.5
J3: Top Overlay "1" at 8.1,3.8 h0.5; Top Overlay "4" at 15.72,3.8 h0.5
J4: Top Overlay "1" at 5.34,32.65 h0.5 r180
J6: Top Overlay "1" at 21.05,11.5 h0.5 r90; Top Overlay "24" at 21.05,23.75 h0.5 r90
T1: Drill Drawing "All drills (PTH and NPTH) should run in one work process" at -101,-43 h0.8; Mechanical 16 "A" at 34.883,44.95 h0.5; Mechanical 16 "B" at 34.883,24.95 h0.5; Mechanical 16 "C" at 34.883,4.95 h0.5; Mechanical 16 "D" at 34.883,-15.05 h0.5; Mechanical 16 "E" at 34.883,-35.05 h0.5; Mechanical 16 "E" at -104.117,-35.05 h0.5; Mechanical 16 "D" at -104.117,-15.05 h0.5; Mechanical 16 "C" at -104.117,4.95 h0.5; Mechanical 16 "B" at -104.117,24.95 h0.5; Mechanical 16 "A" at -104.117,44.95 h0.5; Mechanical 16 "2" at -74.75,54.5 h0.5; Mechanical 16 "3" at -54.75,54.5 h0.5; Mechanical 16 "4" at -34.75,54.5 h0.5; Mechanical 16 "5" at -14.75,54.5 h0.5; Mechanical 16 "6" at 5.25,54.5 h0.5; Mechanical 16 "7" at 25.25,54.5 h0.5; Mechanical 16 "1" at -94.75,54.5 h0.5; Mechanical 16 "1" at -94.75,-44.5 h0.5; Mechanical 16 "7" at 25.25,-44.5 h0.5; Mechanical 16 "6" at 5.25,-44.5 h0.5; Mechanical 16 "5" at -14.75,-44.5 h0.5; Mechanical 16 "4" at -34.75,-44.5 h0.5; Mechanical 16 "3" at -54.75,-44.5 h0.5; Mechanical 16 "2" at -74.75,-44.5 h0.5; Mechanical 16 "Bare Board Revision:" at 6,-31.5 h0.89; Mechanical 16 "Bare Board Number:" at 6,-36 h0.89; Mechanical 16 "Technologies" at -23.75,-33.25 h0.89; Mechanical 16 "File Name:" at -33,-40.5 h0.89; Mechanical 16 "PCB Designer:" at -33,-36 h0.89; Mechanical 16 "Title:" at -49,-31.5 h0.89; Mechanical 16 "Date:" at -49,-40.5 h0.89; Mechanical 16 "Allied Vision" at -23.75,-31.75 h0.89; Mechanical 16 "Taschenweg 2a" at -14.5,-31.75 h0.89; Mechanical 16 "Stadtroda" at -14.25,-33.5 h0.89; Mechanical 16 "Germany" at -1.75,-31.75 h0.89; Mechanical 16 "Layer Name:" at -17,-36 h0.89; Mechanical 16 "Project:" at -49,-36 h0.89
T2: Mechanical 15 "Project:" at 33.5,-36 h0.89; Mechanical 15 "2" at 5.75,-44.5 h0.5; Mechanical 15 "3" at -14.25,-44.5 h0.5; Mechanical 15 "4" at -34.25,-44.5 h0.5; Mechanical 15 "5" at -54.25,-44.5 h0.5; Mechanical 15 "6" at -74.25,-44.5 h0.5; Mechanical 15 "7" at -94.25,-44.5 h0.5; Mechanical 15 "1" at 25.75,-44.5 h0.5; Mechanical 15 "1" at 25.75,54.5 h0.5; Mechanical 15 "7" at -94.25,54.5 h0.5; Mechanical 15 "6" at -74.25,54.5 h0.5; Mechanical 15 "5" at -54.25,54.5 h0.5; Mechanical 15 "4" at -34.25,54.5 h0.5; Mechanical 15 "3" at -14.25,54.5 h0.5; Mechanical 15 "2" at 5.75,54.5 h0.5; Mechanical 15 "A" at 35.117,44.95 h0.5; Mechanical 15 "B" at 35.117,24.95 h0.5; Mechanical 15 "C" at 35.117,4.95 h0.5; Mechanical 15 "D" at 35.117,-15.05 h0.5; Mechanical 15 "E" at 35.117,-35.05 h0.5; Mechanical 15 "E" at -103.883,-35.05 h0.5; Mechanical 15 "D" at -103.883,-15.05 h0.5; Mechanical 15 "C" at -103.883,4.95 h0.5; Mechanical 15 "B" at -103.883,24.95 h0.5; Mechanical 15 "A" at -103.883,44.95 h0.5; Mechanical 15 "Layer Name:" at 1.5,-36 h0.89; Mechanical 15 "Germany" at -13.75,-31.75 h0.89; Mechanical 15 "Stadtroda" at -1.25,-33.5 h0.89; Mechanical 15 "Taschenweg 2a" at -1,-31.75 h0.89; Mechanical 15 "Allied Vision" at 8.25,-31.75 h0.89; Mechanical 15 "Date:" at 33.5,-40.5 h0.89; Mechanical 15 "Title:" at 33.5,-31.5 h0.89; Mechanical 15 "PCB Designer:" at 17.5,-36 h0.89; Mechanical 15 "File Name:" at 17.5,-40.5 h0.89; Mechanical 15 "Technologies" at 8.25,-33.25 h0.89; Mechanical 15 "Bare Board Number:" at -21.5,-36 h0.89; Mechanical 15 "Bare Board Revision:" at -21.5,-31.5 h0.89